# Altium PCB Top-PCB.PcbDoc
Units mm, origin at the board's own origin, x right, y up, seen from the top; angles counter-clockwise.
Board outline 55 x 100 mm, 2 copper layers (Top Layer, Bottom Layer); 65 components, 39 nets, 183 pads, 14 vias.
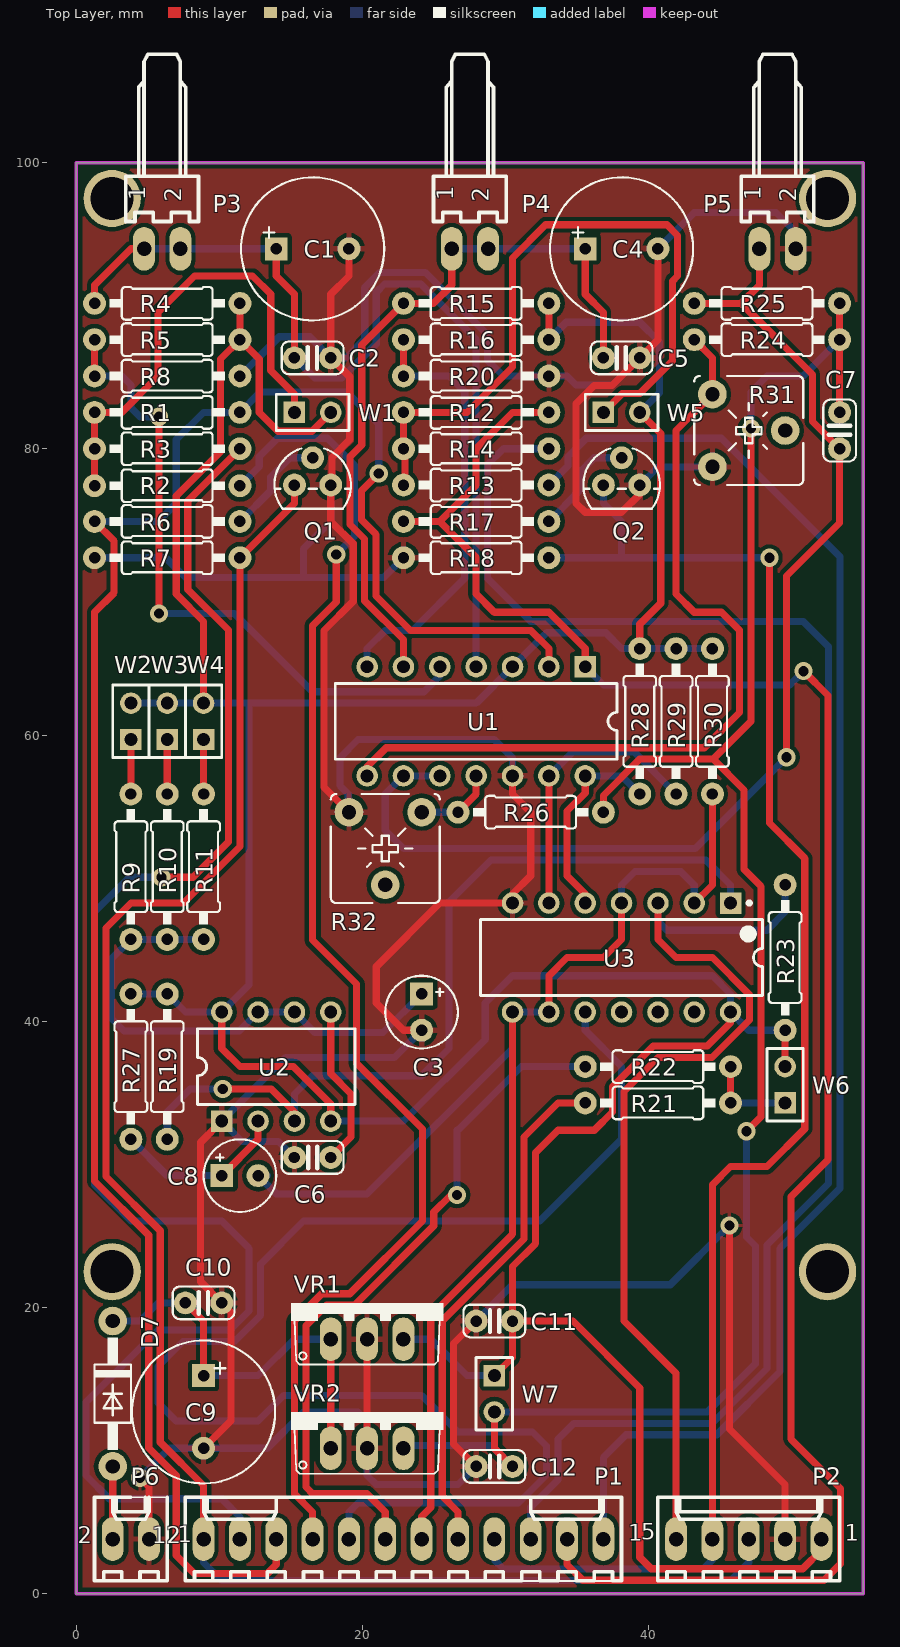
[diagram p0: Top Layer view]
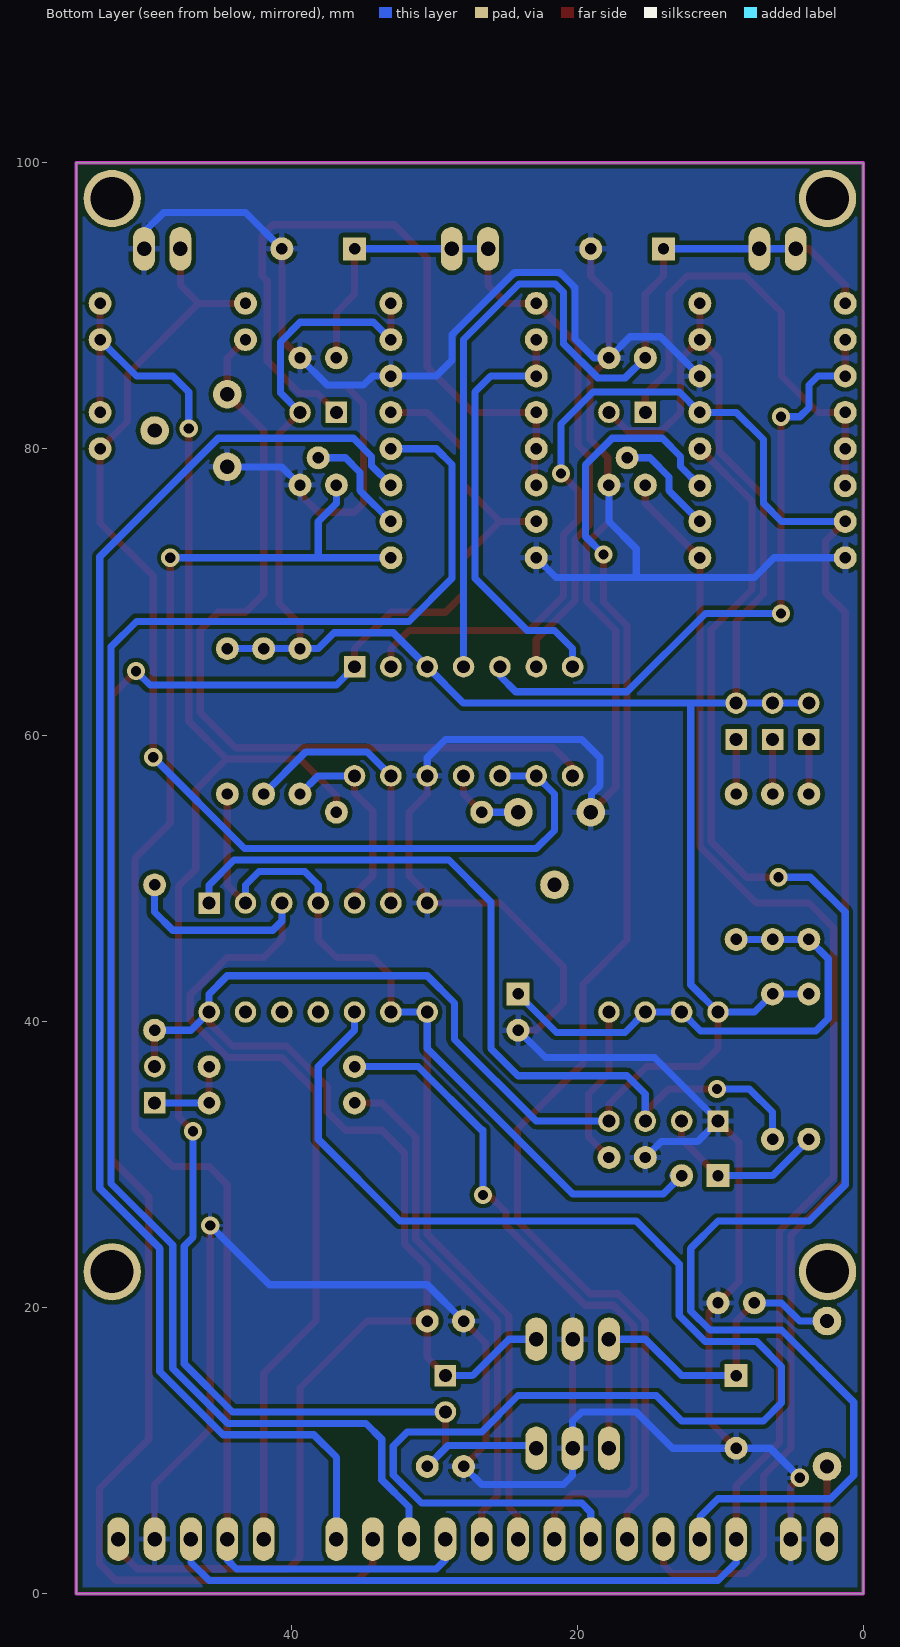
[diagram p1: Bottom Layer view, seen from below]

## Layer stack, top to bottom
Top Solder: solder mask 0.0102, Solder Resist, Dk 3.5
Top Layer: signal copper 0.0356
Dielectric 1: dielectric 0.32, FR-4, Dk 4.8
Bottom Layer: signal copper 0.0356
Bottom Solder: solder mask 0.0102, Solder Resist, Dk 3.5

## Board outline
0,0 55,0 55,100 0,100

## Design rules (kind name [scope] priority, off if disabled: settings)
Clearance Clearance_2 [InNamedPolygon('Top Layer-GND')] p1: gap=0.3 ignorepadtopadclearanceinfootprint=FALSE
Clearance Clearance_1 [InNamedPolygon('Bottom Layer-GND')] p2: gap=0.3 ignorepadtopadclearanceinfootprint=FALSE
Clearance [All] p3: gap=0.3 ignorepadtopadclearanceinfootprint=FALSE
ComponentClearance [All] p1: gap=0 collisioncheckmode=3 verticalgap=0 showdistances=FALSE
PolygonConnect PolygonConnect_2 [All vs IsNamedPolygon('Bottom Layer-GND')] p1: thpad.connectstyle=Relief thpad.reliefconductorwidth=0.4 thpad.reliefentries=4 thpad.polygonreliefangle="90 Angle" thpad.airgapwidth=0.3 smdpad.connectstyle=Relief smdpad.reliefconductorwidth=0.254 smdpad.reliefentries=4 smdpad.polygonreliefangle="90 Angle" smdpad.airgapwidth=0.254 via.connectstyle=Relief via.reliefconductorwidth=0.254 via.reliefentries=4 via.polygonreliefangle="90 Angle" via.airgapwidth=0.254
PolygonConnect PolygonConnect_1 [All vs IsNamedPolygon('Top Layer-GND')] p2: thpad.connectstyle=Relief thpad.reliefconductorwidth=0.4 thpad.reliefentries=4 thpad.polygonreliefangle="90 Angle" thpad.airgapwidth=0.3 smdpad.connectstyle=Relief smdpad.reliefconductorwidth=0.254 smdpad.reliefentries=4 smdpad.polygonreliefangle="90 Angle" smdpad.airgapwidth=0.254 via.connectstyle=Relief via.reliefconductorwidth=0.254 via.reliefentries=4 via.polygonreliefangle="90 Angle" via.airgapwidth=0.254
PolygonConnect [All] p3: connectstyle=Relief reliefconductorwidth=0.254 reliefentries=4 polygonreliefangle="90 Angle" airgapwidth=0.254
RoomDefinition Power-Supply [InComponentClass('Power-Supply')] p1: confinementstyle=ConfineIn formatcopy=TRUE lockcomponents=FALSE outline 0,0 55.88,0 55.88,25.4 0,25.4
RoomDefinition ESD-Monitor [InComponentClass('ESD-Monitor')] p2: confinementstyle=ConfineIn formatcopy=TRUE lockcomponents=FALSE outline -1.27,-1.27 55.88,-1.27 55.88,110.49 -1.27,110.49
RoutingVias [All] p1: holewidth=0.711 width=1.27 viastyle="Through Hole" minholewidth=0.711 minwidth=1.27 maxholewidth=0.711 maxwidth=1.27
SolderMaskExpansion [All] p1: expansion=0.102
Width [All] p1: maxlimit=1 minlimit=0.4 preferedwidth=0.5
29 further rules are at their usual default settings.

## Classes and differential pairs
component class Power-Supply: C9 C10 C11 C12 D7 P6 VR1 VR2 W7

## Components (designator, comment, footprint, x,y, rotation, side; value= is the part's Value field where it differs from the comment)
C1 "1000uF" E3,5-10 16.51,93.98 r0 top
C2 "0.1uF" C025-024X044 16.51,86.36 r180 top
C3 "10uF" E2,5-5 24.13,40.64 r270 top
C4 "1000uF" E3,5-10 38.1,93.98 r0 top
C5 "0.1uF" C025-024X044 38.1,86.36 r180 top
C6 "0.1uF" C025-024X044 16.51,30.48 r0 top
C7 "0.1uF" C025-024X044 53.34,81.28 r90 top
C8 "10uF" E2,5-5 11.43,29.21 r0 top
C9 "1000uF" E3,5-10 8.89,12.7 r270 top
C10 "0.1uF" C025-024X044 8.89,20.32 r180 top
C11 "0.1uF" C025-024X044 29.21,19.05 r0 top
C12 "0.1uF" C025-024X044 29.21,8.89 r0 top
D7 "1N4001" DO41-10 2.54,13.97 r270 top
P1 "Header 12" 6410-12 22.86,3.81 r0 top
P2 "Header 5" 6410-05 46.99,3.81 r0 top
P3 "Header 2" 7395-02 6,93.98 r180 top
P4 "Header 2" 7395-02 27.5,93.98 r180 top
P5 "Header 2" 7395-02 49,93.98 r180 top
P6 "12VAC" 6410-02 3.81,3.81 r0 top
Q1 "NPN" TO92 16.51,77.47 r0 top
Q2 "NPN" TO92 38.1,77.47 r0 top
R1 "2K" 0207/10 6.35,82.55 r180 top
R2 "1K2" 0207/10 6.35,77.419 r180 top
R3 "1K2" 0207/10 6.35,80.01 r180 top
R4 "1K" 0207/10 6.35,90.17 r0 top
R5 "1M" 0207/10 6.35,87.63 r0 top
R6 "100K" 0207/10 6.35,74.93 r180 top
R7 "100K" 0207/10 6.35,72.39 r0 top
R8 "1K" 0207/10 6.35,85.09 r180 top
R9 "330K" 0207/10 3.81,50.8 r90 top
R10 "470K" 0207/10 6.35,50.8 r90 top
R11 "620K" 0207/10 8.89,50.8 r90 top
R12 "2K" 0207/10 27.94,82.55 r180 top
R13 "1K2" 0207/10 27.94,77.47 r180 top
R14 "1K2" 0207/10 27.94,80.01 r180 top
R15 "1K" 0207/10 27.94,90.17 r0 top
R16 "1M" 0207/10 27.94,87.63 r0 top
R17 "100K" 0207/10 27.94,74.93 r180 top
R18 "100K" 0207/10 27.94,72.39 r0 top
R19 "10K" 0207/10 6.35,36.83 r90 top
R20 "1K" 0207/10 27.94,85.09 r180 top
R21 "1K2" 0207/10 40.64,34.29 r0 top
R22 "1K2" 0207/10 40.64,36.83 r0 top
R23 "10K" 0207/10 49.53,44.45 r270 top
R24 "680" 0207/10 48.26,87.63 r0 top
R25 "1M" 0207/10 48.26,90.17 r0 top
R26 "1K" 0207/10 31.75,54.61 r0 top
R27 "1K" 0207/10 3.81,36.83 r90 top
R28 "10K" 0207/10 39.37,60.96 r90 top
R29 "10K" 0207/10 41.91,60.96 r90 top
R30 "5K6" 0207/10 44.45,60.96 r90 top
R31 "100K" CA6V 46.99,81.28 r270 top
R32 "10K" CA6V 21.59,52.07 r180 top
U1 "LM339AN" 646-06 27.94,60.96 r180 top
U2 "NE555N" DIP8 13.97,36.83 r0 top
U3 "CD4001BCN" N14A 38.1,44.45 r270 top
VR1 "LM7815" TO220V 20.32,20.32 r0 top
VR2 "LM7805" TO220V 20.32,12.7 r0 top
W1 "Jumper" HDR1X2 15.24,82.55 r0 top
W2 "Jumper" HDR1X2 3.81,59.69 r90 top
W3 "Jumper" HDR1X2 6.35,59.69 r90 top
W4 "Jumper" HDR1X2 8.89,59.69 r90 top
W5 "Jumper" HDR1X2 36.83,82.55 r0 top
W6 "Jumper" HDR1X2 49.53,34.29 r90 top
W7 "Jumper" HDR1X2 29.21,15.24 r270 top

## Footprints (in the part's own frame and the unit in brackets; to place one, negate y for a bottom-side part, rotate by r counter-clockwise, add the part's x,y. Pads: shape width x height; smd on the part's side, far side on the other; paste and mask are expansions set on the pad)
0207/10 [mm]
  round 1.6 hole 0.8: 1(-5.08,0) 2(5.08,0)
  silkscreen extent -4.04,-1.14 4.04,1.14
646-06 [mm] "DIP; 14 Leads; Row Spacing 7.62 mm; Pitch 2.54 mm"
  rect 1.5x1.5 hole 0.9: 1(-7.62,-3.81)
  round 1.5 hole 0.9: 2(-5.08,-3.81) 3(-2.54,-3.81) 4(0,-3.81) 5(2.54,-3.81) 6(5.08,-3.81) 7(7.62,-3.81) 8(7.62,3.81) 9(5.08,3.81) 10(2.54,3.81) 11(0,3.81) 12(-2.54,3.81) 13(-5.08,3.81) 14(-7.62,3.81)
  silkscreen extent -9.85,-2.65 9.85,2.65
6410-02 [mil]
  oval 60x120 hole 40: 1(50,0) 2(-50,0)
  silkscreen extent -100,-115 100,115
6410-05 [mil]
  oval 60x120 hole 40: 1(200,0) 2(100,0) 3(0,0) 4(-100,0) 5(-200,0)
  silkscreen extent -250,-115 250,115
6410-12 [mil]
  oval 60x120 hole 40: 1(550,0) 2(450,0) 3(350,0) 4(250,0) 5(150,0) 6(50,0) 7(-50,0) 8(-150,0) 9(-250,0) 10(-350,0) 11(-450,0) 12(-550,0)
  silkscreen extent -600,-115 600,115
7395-02 [mil]
  oval 60x120 hole 40: 1(50,0) 2(-50,0)
  silkscreen extent -100,-535 100,-75
C025-024X044 [mm]
  round 1.6 hole 0.8: 1(-1.27,0) 2(1.27,0)
  silkscreen extent -2.16,-1.14 2.16,1.14
CA6V [mm]
  round 2 hole 1: 1(-2.54,-2.54) 2(2.54,-2.54) 3(0,2.54)
  silkscreen extent -3.81,-3.81 3.81,3.81
DIP8 [mm] "DIP; 8 Leads; Row Spacing 7.62 mm; Pitch 2.54 mm"
  rect 1.5x1.5 hole 0.9: 1(-3.81,-3.81)
  round 1.5 hole 0.9: 2(-1.27,-3.81) 3(1.27,-3.81) 4(3.81,-3.81) 5(3.81,3.81) 6(1.27,3.81) 7(-1.27,3.81) 8(-3.81,3.81)
  silkscreen extent -5.5,-2.65 5.5,2.65
DO41-10 [mm]
  round 2 hole 1: 1(5.08,0) 2(-5.08,0)
  silkscreen extent -3.94,-1.27 3.94,1.27
E2,5-5 [mil]
  rect 63x63 hole 31.5: 1(-50,0)
  round 63 hole 31.5: 2(50,0)
  silkscreen extent -100,-100 100,100
E3,5-10 [mil]
  rect 63x63 hole 31.5: 1(-100,0)
  round 63 hole 31.5: 2(100,0)
  silkscreen extent -197,-197 197,197
HDR1X2 [mm] "Connector; Header; 2 Position"
  rect 1.5x1.5 hole 0.9: 1(0,0)
  round 1.5 hole 0.9: 2(2.54,0)
  silkscreen extent -1.27,-1.27 3.81,1.27
N14A [mm] "DIP, 14-Leads, Row Spacing 7.62mm, Pitch 2.54mm, Body 19.18x6.35mm"
  rect 1.5x1.5 hole 0.9: 1(-3.81,7.62)
  round 1.5 hole 0.9: 2(-3.81,5.08) 3(-3.81,2.54) 4(-3.81,0) 5(-3.81,-2.54) 6(-3.81,-5.08) 7(-3.81,-7.62) 8(3.81,-7.62) 9(3.81,-5.08) 10(3.81,-2.54) 11(3.81,0) 12(3.81,2.54) 13(3.81,5.08) 14(3.81,7.62)
  silkscreen extent -3.93,-9.85 2.65,9.85, body extent -3.55,-9.85 3.55,9.85, height 5.08
TO92 [mm]
  round 1.6 hole 0.8: 1(-1.27,0) 2(0,1.905) 3(1.27,0)
  silkscreen extent -2.67,-1.65 2.68,2.57
TO220V [mil]
  oval 60x120 hole 40: 1(-100,-100) 2(0,-100) 3(100,-100)
  silkscreen extent -210,-170 210,0

## Part data
C1 C3 C4 C8 C9: library part "Cap Pol1", "Polarized Capacitor (Radial)", LatestRevisionDate=17-Jul-2002, LatestRevisionNote="Re-released for DXP Platform.", PackageDescription="Polarized Capacitor (Radial); 2 Leads", PackageReference=RB7.6-15, Published=8-Jun-2000, Publisher="Altium Limited"
C2 C5 C6 C7 C10 C11 C12: library part Cap, "Capacitor", LatestRevisionDate=17-Jul-2002, LatestRevisionNote="Re-released for DXP Platform.", PackageDescription="Radial Cap, Thru-Hole; 2 Leads; 0.3 in Pin Spacing", PackageReference=RAD-0.3, Published=8-Jun-2000, Publisher="Altium Limited"
D7: library part Diode, "Default Diode", Code_JEDEC=DO-214-AB, LatestRevisionDate=17-Jul-2002, LatestRevisionNote="Re-released for DXP Platform.", PackageDescription="DO-214-AB/SMC; 2 C-Bend Leads; Body 7.9 x 5.9 mm, inc. leads (LxW)", PackageReference=SMC, PackageVersion=Sep-1996, Published=8-Jun-2000, Publisher="Altium Limited"
P1: "Header, 12-Pin", LatestRevisionDate=17-Jul-2002, LatestRevisionNote="Re-released for DXP Platform.", Publisher="Altium Limited"
P2: "Header, 5-Pin", LatestRevisionDate=17-Jul-2002, LatestRevisionNote="Re-released for DXP Platform.", Publisher="Altium Limited"
P3 P4 P5: "Header, 2-Pin", LatestRevisionDate=17-Jul-2002, LatestRevisionNote="Re-released for DXP Platform.", Publisher="Altium Limited"
P6: library part "Header 2", "Header, 2-Pin", LatestRevisionDate=17-Jul-2002, LatestRevisionNote="Re-released for DXP Platform.", Publisher="Altium Limited"
Q1 Q2: "NPN Bipolar Transistor", Code_JEDEC=TO-226-AA, LatestRevisionDate=17-Jul-2002, LatestRevisionNote="Re-released for DXP Platform.", PackageDescription="TO, Flat Index; 3 In-Line, Axial Leads; Body Dia. 4.8mm; Leads 0.55 x 0.51 mm (max)", PackageReference=TO-226-AA, Published=8-Jun-2000, Publisher="Altium Limited"
R1 R2 R3 R4 R5 R6 R7 R8 R9 R10 R11 R12 R13 R14 R15 R16 R17 R18 R19 R20 R21 R22 R23 R24 R25 R26 R27 R28 R29 R30: library part Res1, "Resistor", LatestRevisionDate=17-Jul-2002, LatestRevisionNote="Re-released for DXP Platform.", PackageDescription="Axial Device, Thru-Hole; 2 Leads; 0.3 in Pin Spacing", PackageReference=AXIAL-0.3, Published=8-Jun-2000, Publisher="Altium Limited"
R31 R32: library part "Res Adj1", "Variable Resistor", LatestRevisionDate=17-Jul-2002, LatestRevisionNote="Re-released for DXP Platform.", PackageDescription="Axial Device, Thru-Hole; 2 Leads; 0.7 in Pin Spacing", PackageReference=AXIAL-0.7, Published=8-Jun-2000, Publisher="Altium Limited", Set Position=0.5
U1: "Quad Single-Supply Comparator", ComponentLink1Description="Manufacturer Link", ComponentLink1URL=http://www.onsemi.com/site/products/taxonomy/0,4438,133,00.html, DatasheetVersion=1988, LatestRevisionDate=06-Jun-2005, LatestRevisionNote="Stylized 3D Model Added.", PackageDescription="DIP; 14 Leads; Row Spacing 7.62 mm; Pitch 2.54 mm", PackageReference=646-06, PackageVersion=1997, Published=17-Jul-2002, Publisher="Altium Limited"
U2: "General-Purpose Single Bipolar Timer", Code_JEDEC=MO-001-AN, ComponentLink1Description="Manufacturer Link", ComponentLink1URL=http://www.st.com/, ComponentLink2Description=Datasheet, ComponentLink2URL=http://www.st.com/stonline/products/literature/ds/2182/ne555.pdf, DatasheetVersion=Jul-1998, LatestRevisionDate=06-Jun-2005, LatestRevisionNote="Stylized 3D Model Added.", PackageDescription="DIP; 8 Leads; Row Spacing 7.62 mm; Pitch 2.54 mm", PackageReference=DIP8, Published=24-Aug-2001, Publisher="Altium Limited"
U3: "Quad 2-Input NOR Buffered B series Gate, 14-Pin PDIP", ComponentLink1Description="Manufacturer Link", ComponentLink1URL=http://www.fairchildsemi.com/, ComponentLink2Description=Datasheet, ComponentLink2URL=http://www.fairchildsemi.com/ds/CD%2FCD4001BC.pdf, DatasheetVersion=Jan-1999, IC_Technology=C, LatestRevisionDate=29-May-2009, LatestRevisionNote="Component Body Added.", PackageDescription="DIP, 14-Pin, Row Spacing 7.62 mm, Pitch 2.54 mm", PackageReference=N14A, PackageVersion=2000, Published=17-Jul-2002, Publisher="Altium Limited"
VR1 VR2: library part "Volt Reg", "Voltage Regulator", LatestRevisionDate=29-May-2009, LatestRevisionNote="IPC-7351 Footprint Added.", PackageDescription="3-Pin Transistor Outline Package 2.54 mm Pitch, 15.1 mm Lead Span", PackageReference=D2PAK, Published=24-Mar-1999, Publisher="Altium Limited"
W1 W2 W3 W4 W5 W6 W7: "Jumper Wire", LatestRevisionDate=17-Jul-2002, LatestRevisionNote="Re-released for DXP Platform.", PackageDescription="Radial Cap, Thru-Hole; 2 Leads; 0.2 in Pin Spacing", PackageReference=RAD-0.2, Published=24-Mar-1999, Publisher="Altium Limited"

## Free pads (board coordinates)
  round 4 hole 3: 6(2.5,97.5) 7(52.5,97.5) 8(2.5,22.5) 9(52.5,22.5)

## Via types
v1: diameter 1.27, hole 0.711, Top Layer to Bottom Layer, 14 vias

## Nets (pads, with @x,y where several pads share a name; then routed paths per layer and width w, separated by ;. In a path a pad name is that pad's centre, name@x,y a point inside that pad or via, vN(x,y) a via of type N, cw(c..) or ccw(c..) an arc to the next point about the centre after c; other vN are vias at no path point)
15V: C11.2 P2.1 R4.2 R5.2 R15.2 R16.2 R19.2 R23.2 R27.2 R28.2 R29.2 R30.2 U1.3 U2.4 U2.8 U3.14 VR1.3 W1.2 W2.2 W3.2 W4.2 W5.2 W6.2 W7.1 | length 284.9
  Top Layer w0.5: W4.2 8.89,67.945 6.985,69.85 6.985,76.696 10.08,79.791 10.08,86.28 R5.2 ; U2.8 10.16,38.1 11.43,36.83 15.164,36.83 17.78,34.214 U2.4 ; R4.2 R5.2 ; W1.2 16.459,81.229 14.101,81.229 12.78,82.55 12.78,86.28 R5.2 ; W7.1 30.48,16.51 C11.2 ; R16.2 R15.2 ; R28.2 39.37,67.742 40.843,69.215 40.843,81.077 W5.2 ; U3.14 45.72,39.892 44.093,38.265 40.309,38.265 37.465,35.421 37.465,33.655 36.195,32.385 33.655,32.385 32.08,30.81 32.08,24.458 30.48,22.858 C11.2 ; W6.2 R23.2 ; P2.1 52.07,3.048 50.758,1.736 40.174,1.736 39.37,2.54 39.37,14.376 34.696,19.05 C11.2
  Bottom Layer w0.5: R27.2 R19.2 7.62,40.64 U2.8 12.065,42.545 12.065,62.23 ; W2.2 W3.2 W4.2 12.065,62.23 ; U2.4 22.86,33.02 28.575,38.735 28.575,41.275 30.48,43.18 44.45,43.18 45.72,41.91 U3.14 46.99,39.37 R23.2 ; VR1.3 24.765,17.78 27.305,15.24 W7.1 ; R16.2 34.239,88.849 39.37,88.849 40.742,87.478 40.742,83.922 W5.2 ; R30.2 R29.2 R28.2 38.1,66.04 36.995,67.145 32.855,67.145 U1.3 27.94,62.23 12.065,62.23
GND: C1.2 C2.1 C3.2 C4.2 C5.1 C6.1 C9.2 C10.1 C11.1 C12.1 P2.2 P5.2 P6.1 Q1.3 Q2.3 R7.1 R8.1 R18.1 R20.1 R31.2 R32.2 U1.12 U2.1 U3.7 VR1.2 VR2.2 | length 349.4
  Top Layer w0.5: v1(4.445,8.103) 5.08,7.468 P6.1 ; C9.2 10.795,12.065 10.795,19.685 C10.1 8.687,21.793 8.687,31.547 U2.1 ; R32.2 17.31,56.35 17.31,67.31 19.346,69.346 19.346,73.364 17.78,74.93 Q1.3 17.86,77.55 17.86,79.404 19.101,80.645 19.101,85.039 C2.1 17.78,90.805 19.05,92.075 C1.2 ; VR2.2 VR1.2 ; C3.2 22.86,39.37 20.955,41.275 20.955,43.815 25.4,48.26 U3.7 30.48,48.895 31.75,50.165 31.75,54.61 30.48,55.88 U1.12 ; C12.1 26.365,10.465 26.365,17.475 C11.1 ; Q2.3 39.37,76.835 38.1,75.565 35.56,75.565 34.925,76.2 34.925,83.16 36.195,84.43 37.44,84.43 C5.1 40.64,87.63 C4.2 ; v1(45.644,25.73) 45.644,11.506 49.53,7.62 P2.2
  Bottom Layer w0.5: R7.1 6.248,72.39 7.62,71.018 15.875,71.018 ; v1(4.445,8.103) 6.502,10.16 C9.2 13.335,10.16 15.875,12.7 19.685,12.7 20.32,12.065 VR2.2 20.32,8.255 20.955,7.62 26.67,7.62 C12.1 ; R8.1 14.173,87.833 16.307,87.833 C2.1 18.833,86.36 20.155,87.682 20.155,91.275 21.2,92.32 24.393,92.32 28.74,87.973 28.74,86.195 29.845,85.09 R20.1 34.29,85.09 34.925,84.455 37.465,84.455 C5.1 ; C6.1 14.122,31.598 11.582,31.598 U2.1 14.605,37.465 22.225,37.465 C3.2 ; Q1.3 17.78,74.93 15.875,73.025 15.875,71.018 ; R32.2 19.05,55.423 18.999,55.423 18.999,55.88 18.415,56.464 18.415,58.42 19.685,59.69 29.21,59.69 30.48,58.42 U1.12 ; R18.1 21.488,71.018 15.875,71.018 ; C11.1 30.48,21.59 41.504,21.59 v1(45.644,25.73) ; Q2.3 40.64,78.74 R31.2 ; C4.2 43.18,96.52 48.895,96.52 50.27,95.145 P5.2
M_G_A: P1.3 R14.1 | length 115.1
  Bottom Layer w0.5: P1.3 31.75,6.054 33.655,7.959 33.655,10.795 34.76,11.9 44.424,11.9 48.26,15.736 48.26,24.354 52.569,28.663 52.569,66.176 50.8,67.945 31.75,67.945 28.74,70.955 28.74,78.905 29.845,80.01 R14.1
M_R_A: P1.1 R13.1 | length 104.7
  Bottom Layer w0.5: R13.1 34.366,78.816 34.366,79.477 35.636,80.747 45.085,80.747 53.369,72.462 53.369,28.325 49.174,24.13 49.174,15.519 44.755,11.1 38.405,11.1 36.83,9.525 P1.1
M_R_K: P1.2 R12.1 R17.2 U1.1 | length 135
  Top Layer w0.5: R17.2 25.4,74.93 ; R12.1 30.48,82.55 27.94,80.01 27.94,77.47 25.4,74.93 ; P1.2 34.29,2.032 35.386,0.936 52.244,0.936 53.391,2.083 53.391,7.341 49.936,10.795 49.936,27.737 52.527,30.328 52.527,62.763 v1(50.825,64.465) ; U1.1 35.56,66.04 33.02,68.58 29.21,68.58 27.94,69.85 27.94,72.39 25.4,74.93
  Bottom Layer w0.5: U1.1 36.83,63.5 49.86,63.5 v1(50.825,64.465)
MACHINE: P1.4 P2.4 Q2.1 R18.2 | length 113.4
  Top Layer w0.5: P2.4 44.45,28.575 45.72,29.845 48.26,29.845 50.902,32.487 50.902,51.384 48.438,53.848 v1(48.438,72.39)
  Bottom Layer w0.5: P1.4 29.21,2.362 29.845,1.727 43.815,1.727 44.45,2.362 P2.4 ; R18.2 38.1,72.39 ; Q2.1 36.83,76.2 38.1,74.93 38.1,72.39 ; v1(48.438,72.39) 38.1,72.39
NetC1_1: C1.1 C2.2 P3.1 P3.2 R4.1 U1.4 | length 65.7
  Top Layer w0.5: R4.1 1.27,91.44 3.81,93.98 P3.1 ; C1.1 13.97,92.075 15.24,90.805 C2.2
  Bottom Layer w0.5: P3.1 P3.2 C1.1 ; C2.2 16.637,84.963 18.567,84.963 20.955,87.351 20.955,90.944 21.531,91.52 24.062,91.52 27.94,87.642 U1.4
NetC3_1: C3.1 R9.1 R10.1 R11.1 U2.6 U2.7 | length 35.5
  Bottom Layer w0.5: R11.1 R10.1 R9.1 2.46,44.37 2.46,40.187 3.327,39.319 11.379,39.319 U2.7 U2.6 16.662,39.218 21.438,39.218 C3.1
NetC4_1: C4.1 C5.2 P4.1 P4.2 R15.1 U1.6 | length 52.4
  Top Layer w0.5: U1.6 22.86,66.675 20.146,69.389 20.146,73.695 19.13,74.711 19.13,79.455 19.94,80.265 19.94,87.25 R15.1 24.96,90.17 26.23,91.44 P4.1 ; C4.1 35.56,90.805 36.83,89.535 C5.2
  Bottom Layer w0.5: P4.1 P4.2 C4.1
NetC6_2: C6.2 U2.5 | length 11.3
  Top Layer w0.5: C6.2 19.202,31.902 19.202,34.925 17.78,36.347 U2.5
NetC7_1: C7.1 P5.1 R25.1 U1.9 U1.10 | length 81.8
  Top Layer w0.5: R25.1 46.46,90.17 ; P5.1 47.73,91.44 46.46,90.17 ; v1(49.632,58.445) 49.632,71.12 53.34,74.828 C7.1 51.435,81.915 51.435,85.195 46.46,90.17
  Bottom Layer w0.5: U1.10 U1.9 21.59,55.88 21.59,53.34 22.86,52.07 43.256,52.07 v1(49.632,58.445)
NetC8_1: C8.1 R27.1 U2.2 | length 12.3
  Top Layer w0.5: C8.1 12.7,31.75 U2.2
  Bottom Layer w0.5: R27.1 6.35,29.21 C8.1
NetC9_1: C9.1 C10.2 D7.2 VR1.1 VR2.1 | length 28.8
  Top Layer w0.5: C10.2 8.89,19.05 C9.1 ; VR2.1 VR1.1
  Bottom Layer w0.5: D7.2 4.445,19.05 5.715,20.32 C10.2 ; C9.1 12.7,15.24 15.24,17.78 VR1.1
NetD7_1: D7.1 P6.2 | length 5.1
  Top Layer w0.5: P6.2 D7.1
NetQ1_2: Q1.2 R6.1 | length 7.5
  Bottom Layer w0.5: R6.1 13.58,77.08 13.58,78.033 14.922,79.375 Q1.2
NetQ2_2: Q2.2 R17.1 | length 7.7
  Bottom Layer w0.5: R17.1 35.17,77.08 35.17,78.35 36.195,79.375 Q2.2
NetR1_2: R1.2 R2.2 R3.2 W1.1 | length 33.5
  Top Layer w0.5: R2.2 R3.2 R1.2 3.175,82.55 5.715,85.09 5.715,89.535 8.255,92.075 12.319,92.075 13.58,90.814 13.58,85.48 15.24,83.82 W1.1
NetR5_1: R5.1 R8.2 U1.5 | length 45.9
  Top Layer w0.5: R8.2 R5.1 ; v1(5.766,68.504) v1(5.766,82.245)
  Bottom Layer w0.5: R8.2 3.175,85.09 3.81,84.455 3.81,82.88 4.445,82.245 v1(5.766,82.245) ; v1(5.766,68.504) 11.036,68.504 16.51,63.03 24.295,63.03 25.4,64.135 U1.5
NetR9_2: R9.2 W2.1 | length 3.8
  Top Layer w0.5: R9.2 W2.1
NetR10_2: R10.2 W3.1 | length 3.8
  Top Layer w0.5: R10.2 W3.1
NetR11_2: R11.2 W4.1 | length 3.8
  Top Layer w0.5: R11.2 W4.1
NetR12_2: R12.2 R13.2 R14.2 W5.1 | length 49.8
  Top Layer w0.5: R13.2 22.974,77.584 22.974,79.896 R14.2 R12.2 27.305,82.55 30.48,85.725 30.48,93.345 32.791,95.656 41.275,95.656 42.012,94.92 42.012,92.075 41.656,91.719 41.656,86.157 39.37,83.871 38.151,83.871 W5.1
NetR16_1: R16.1 R20.2 U1.7 | length 30.4
  Top Layer w0.5: R20.2 R16.1
  Bottom Layer w0.5: U1.7 20.32,66.04 21.59,67.31 23.495,67.31 27.14,70.955 27.14,83.985 26.035,85.09 R20.2
NetR19_1: R19.1 U2.3 U3.1 | length 59.9
  Top Layer w0.5: v1(10.236,35.255) 13.64,35.255 15.24,33.655 U2.3
  Bottom Layer w0.5: R19.1 6.35,33.655 7.95,35.255 v1(10.236,35.255) ; U2.3 15.24,34.925 16.51,36.195 24.13,36.195 26.035,38.1 26.035,48.336 28.969,51.27 43.98,51.27 45.72,49.53 U3.1
NetR21_2: R21.2 R22.2 W6.1 | length 6.3
  Top Layer w0.5: R21.2 R22.2
  Bottom Layer w0.5: R21.2 W6.1
NetR24_1: R24.1 R31.1 U1.8 | length 58.8
  Top Layer w0.5: U1.8 20.32,57.785 21.653,59.118 43.878,59.118 46.342,61.582 46.342,67.323 45.085,68.58 43.18,68.58 41.91,69.85 41.91,81.28 R31.1 44.45,86.36 R24.1
NetR26_1: R26.1 R32.1 U1.11 | length 5.6
  Top Layer w0.5: R26.1 27.94,55.88 U1.11
  Bottom Layer w0.5: R32.1 R26.1
NetR28_1: R28.1 U1.14 U3.5 | length 14.3
  Top Layer w0.5: U3.5 35.56,48.895 34.29,50.165 34.29,54.686 35.56,55.956 U1.14
  Bottom Layer w0.5: U1.14 38.1,57.15 R28.1
NetR29_1: R29.1 U1.13 U3.6 | length 19.7
  Top Layer w0.5: U3.6 U1.13
  Bottom Layer w0.5: U1.13 34.696,58.826 38.964,58.826 R29.1
T_G_A: P1.11 R3.1 | length 110.3
  Top Layer w0.5: v1(5.944,50.063) 8.153,50.063 10.63,52.54 10.63,67.336 7.785,70.181 7.785,76.365 R3.1
  Bottom Layer w0.5: v1(5.944,50.063) 3.708,50.063 1.27,47.625 1.27,28.575 3.81,26.035 10.16,26.035 12.065,24.13 12.065,19.761 10.719,18.415 5.715,18.415 0.677,13.377 0.677,8.255 2.303,6.629 10.16,6.629 11.43,5.359 P1.11
T_R_A: P1.9 R2.1 | length 95.4
  Top Layer w0.5: P1.9 16.51,5.715 15.24,6.985 15.24,19.05 17.145,20.955 19.101,20.955 24.181,26.035 24.181,32.461 19.583,37.059 19.583,42.596 16.51,45.669 16.51,67.641 18.161,69.292 v1(18.161,72.619)
  Bottom Layer w0.5: R2.1 12.776,78.765 12.776,79.477 14.046,80.747 17.551,80.747 19.431,78.867 19.431,73.889 v1(18.161,72.619)
T_R_K: P1.10 R1.1 R6.2 U1.2 | length 140.3
  Top Layer w0.5: R6.2 2.642,73.558 2.642,69.952 1.27,68.58 1.27,28.829 5.055,25.044 5.055,10.185 6.985,8.255 6.985,2.667 8.255,1.397 13.335,1.397 13.97,2.032 P1.10 ; v1(21.133,78.283) 19.93,77.08 19.93,75.043 20.946,74.027 20.946,69.72 23.356,67.31 31.75,67.31 33.02,66.04 U1.2
  Bottom Layer w0.5: R6.2 5.715,74.93 6.985,76.2 6.985,80.645 8.89,82.55 R1.1 12.852,83.972 18.898,83.972 21.133,81.737 v1(21.133,78.283)
TABLE: P1.12 P2.3 Q1.1 R7.2 | length 126.5
  Top Layer w0.5: P1.12 8.89,7.561 5.867,10.584 5.867,25.363 2.07,29.16 2.07,46.52 3.81,48.26 7.481,48.26 11.43,52.209 R7.2 15.24,76.2 Q1.1
  Bottom Layer w0.5: P1.12 8.89,2.184 10.16,0.914 45.72,0.914 46.99,2.184 P2.3
VCC: C7.2 C12.2 R24.2 R25.2 R26.2 VR2.3 W7.2 | length 128.7
  Top Layer w0.5: W7.2 29.21,10.16 C12.2 ; R26.2 36.83,55.778 39.37,58.318 44.501,58.318 ; v1(46.838,32.309) 47.854,33.325 47.854,49.428 46.66,50.622 46.66,56.159 44.501,58.318 ; v1(47.142,81.432) 47.142,60.96 44.501,58.318 ; C7.2 R24.2 R25.2
  Bottom Layer w0.5: VR2.3 22.86,10.363 29.007,10.363 C12.2 ; W7.2 44.092,12.7 47.46,16.068 47.46,24.295 46.838,24.917 v1(46.838,32.309) ; v1(47.142,81.432) 47.142,83.972 48.26,85.09 50.8,85.09 R24.2
W_G_A: P1.7 R22.1 | length 49.7
  Top Layer w0.5: P1.7 21.59,5.715 20.32,6.985 16.51,6.985 16.04,7.455 16.04,18.719 17.476,20.155 19.432,20.155 24.981,25.704 24.981,26.67 26.175,27.864 v1(26.594,27.864)
  Bottom Layer w0.5: v1(26.594,27.864) 26.594,32.385 26.67,32.385 31.115,36.83 R22.1
W_G_K: P1.8 U3.10 | length 102.2
  Bottom Layer w0.5: P1.8 19.05,5.69 19.685,6.325 30.889,6.325 32.855,8.291 32.855,10.325 31.877,11.303 26.67,11.303 24.13,13.843 14.478,13.843 12.7,12.065 6.985,12.065 5.715,13.335 5.715,15.875 7.455,17.615 11.05,17.615 12.865,19.43 12.865,23.025 15.875,26.035 32.385,26.035 38.1,31.75 38.1,36.83 35.56,39.37 U3.10
W_R_A: P1.5 R21.1 | length 36.2
  Top Layer w0.5: P1.5 26.67,5.715 25.565,6.82 25.565,19.074 31.28,24.789 31.28,31.915 33.655,34.29 R21.1
W_R_K: C8.2 P1.6 R30.1 U3.2 U3.4 U3.8 U3.9 | length 95.4
  Top Layer w0.5: P1.6 24.13,5.385 24.765,6.02 24.765,19.406 30.48,25.121 U3.8 ; U3.9 33.02,43.18 34.29,44.45 36.83,44.45 38.1,45.72 U3.4 ; U3.2 44.45,49.53 R30.1
  Bottom Layer w0.5: C8.2@13.335,29.21 C8.2 13.97,27.94 20.32,27.94 30.48,38.1 U3.8 U3.9 ; U3.4 38.1,49.53 39.04,50.47 42.24,50.47 43.18,49.53 U3.2
WRISTSTRAP: P2.5 R23.1 U3.3 | length 68.8
  Top Layer w0.5: U3.3 40.64,45.72 41.91,44.45 44.45,44.45 47.041,41.859 47.041,40.081 44.425,37.465 40.64,37.465 38.265,35.09 38.265,19.05 41.91,15.405 P2.5
  Bottom Layer w0.5: U3.3 40.64,46.99 41.275,46.355 48.26,46.355 49.53,47.625 R23.1
pads on no net: R31.3 R32.3 U3.11 U3.12 U3.13

## Polygon pours and split planes (outlines as drawn)
GND on Bottom Layer "Bottom Layer-GND" (solid, remove dead copper, pour order 0): 0,0 55,0 55,100 0,100
GND on Top Layer "Top Layer-GND" (solid, remove dead copper, pour order 2): 0,0 55,0 55,100 0,100

## Keep-outs
Keep-Out Layer:
  the board outline again, w0.254

## Text inside footprints (layer, text, board x,y; h text height)
P1: Top Overlay "1" at 38.583,3.326 h1.97; Top Overlay "12" at 5.307,3.123 h1.97
P2: Top Overlay "1" at 53.696,3.326 h1.97; Top Overlay "5" at 39.47,3.377 h1.97
P3: Top Overlay "1" at 5.213,97.382 h1.97 r90; Top Overlay "2" at 7.703,97.255 h1.97 r90
P4: Top Overlay "1" at 26.713,97.382 h1.97 r90; Top Overlay "2" at 29.203,97.255 h1.97 r90
P5: Top Overlay "1" at 48.213,97.382 h1.97 r90; Top Overlay "2" at 50.703,97.255 h1.97 r90
P6: Top Overlay "1" at 7.087,3.199 h1.97; Top Overlay "2" at 0.1,3.123 h1.97
VR1: Mechanical 16 "3" at 22.225,17.145 h1.97; Mechanical 16 "2" at 19.685,17.145 h1.97; Mechanical 16 "1" at 17.145,17.145 h1.97
VR2: Mechanical 16 "3" at 22.225,9.525 h1.97; Mechanical 16 "2" at 19.685,9.525 h1.97; Mechanical 16 "1" at 17.145,9.525 h1.97